# Altium PCB hut bui.PcbDoc
Units mil, origin at the board's own origin, x right, y up, seen from the top; angles counter-clockwise.
Board outline 6000 x 4000 mil, 2 copper layers (Top Layer, Bottom Layer); 10 components, 9 nets, 28 pads, 2 vias.
Unrouted connection lines stored in the file: 1.
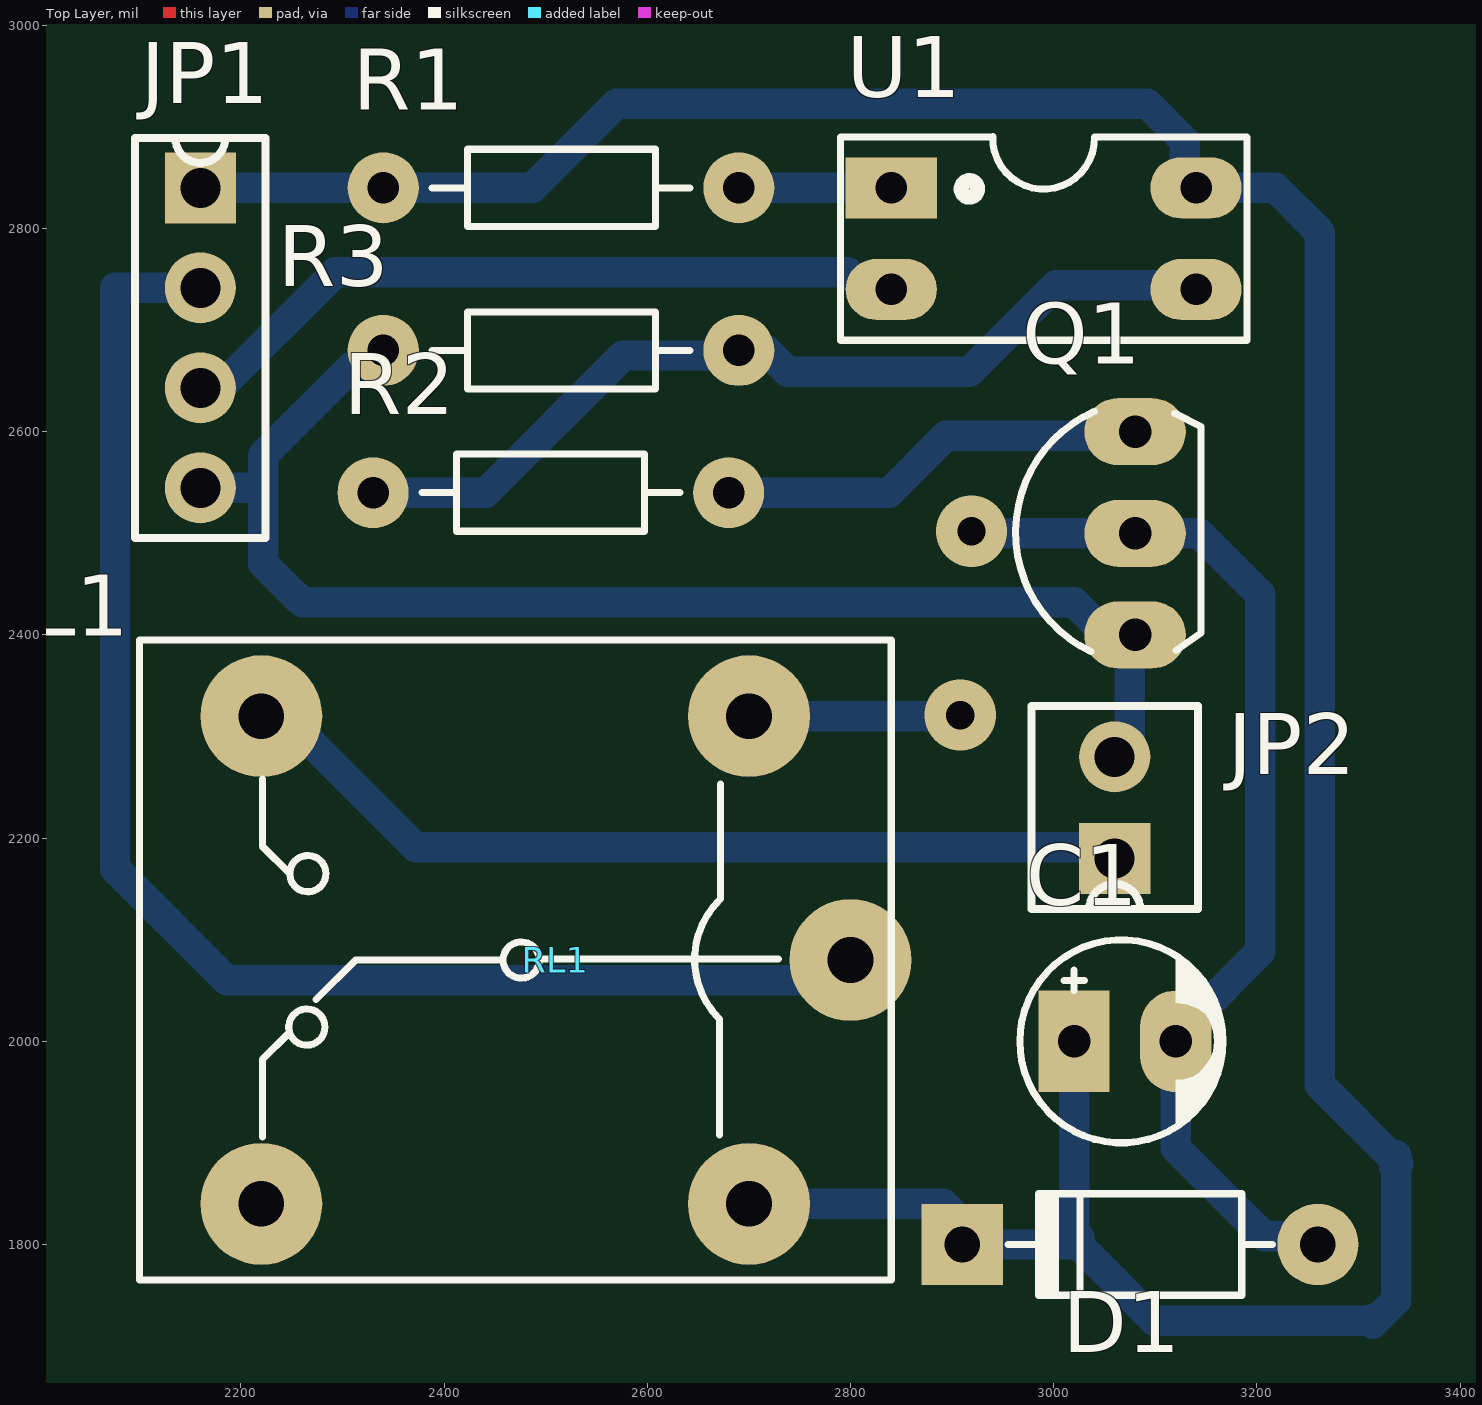
[diagram p0: Top Layer view]
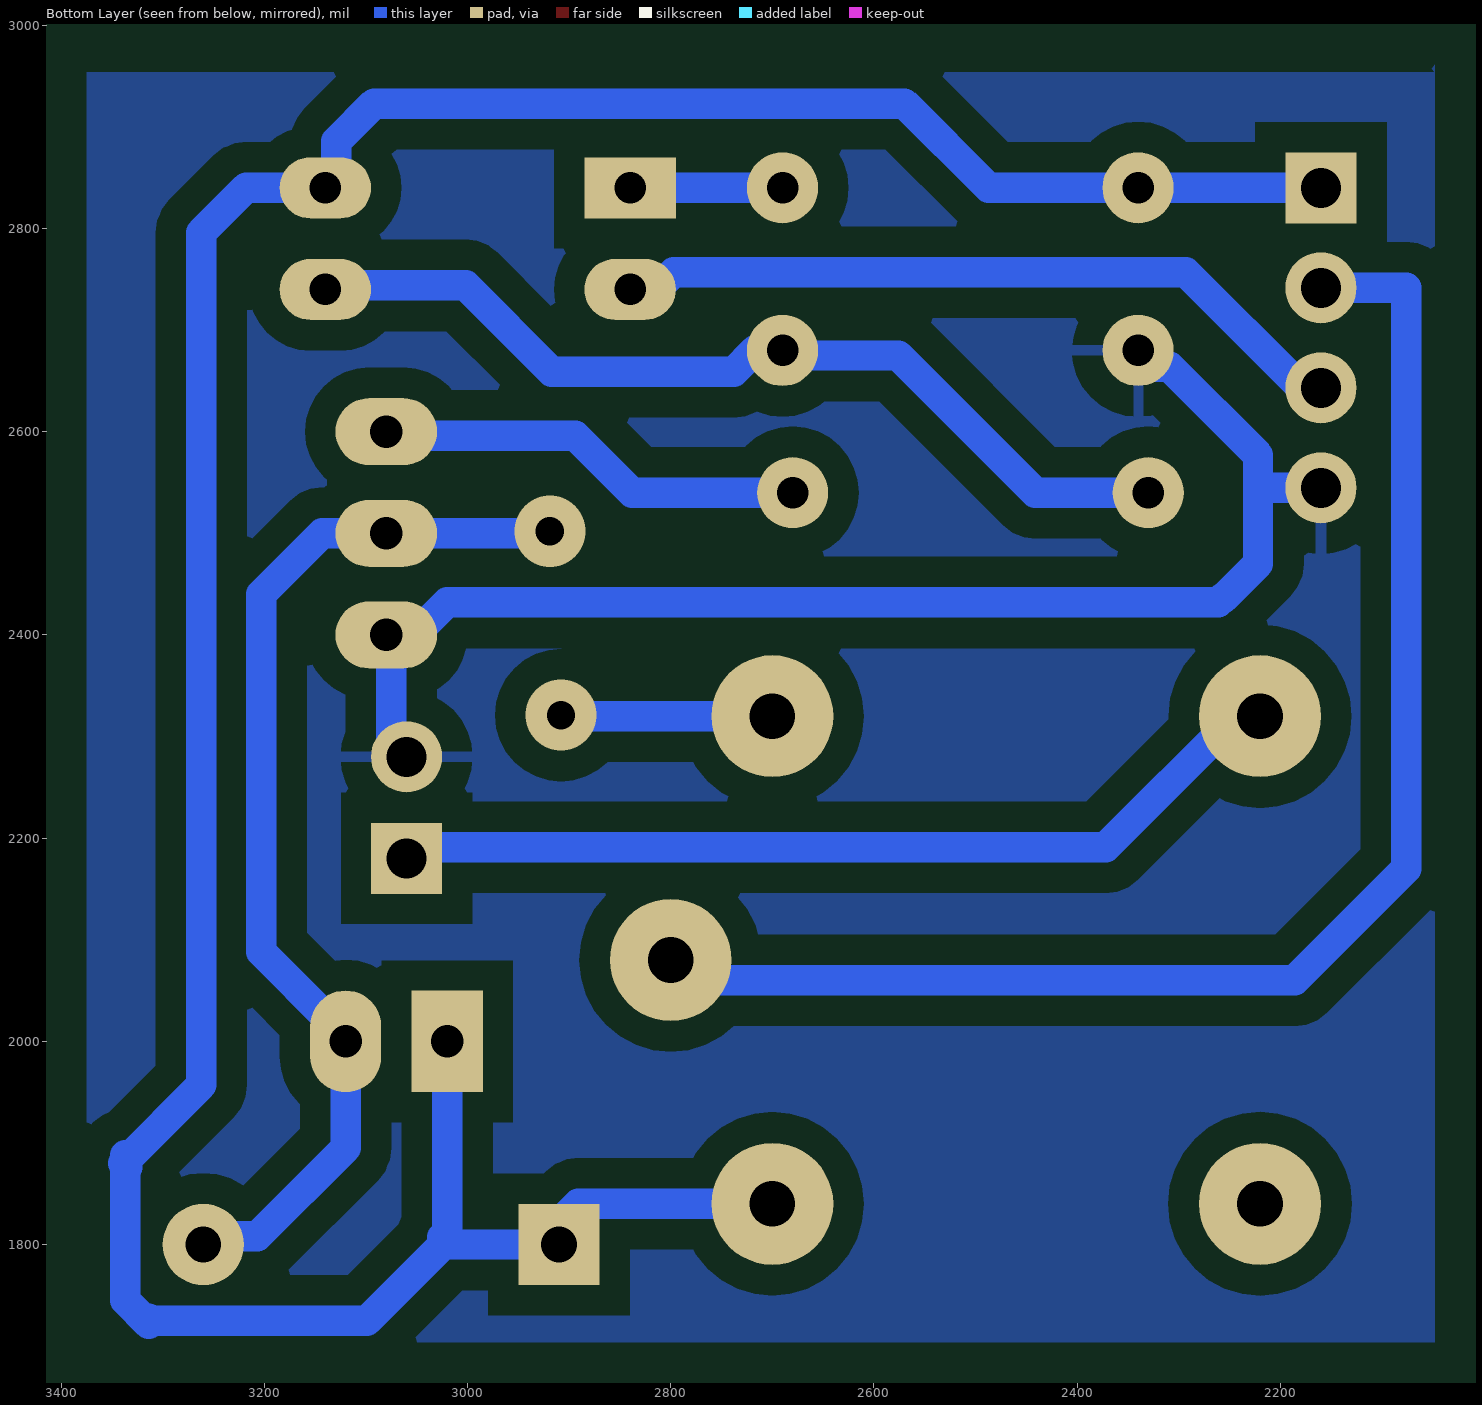
[diagram p1: Bottom Layer view, seen from below]
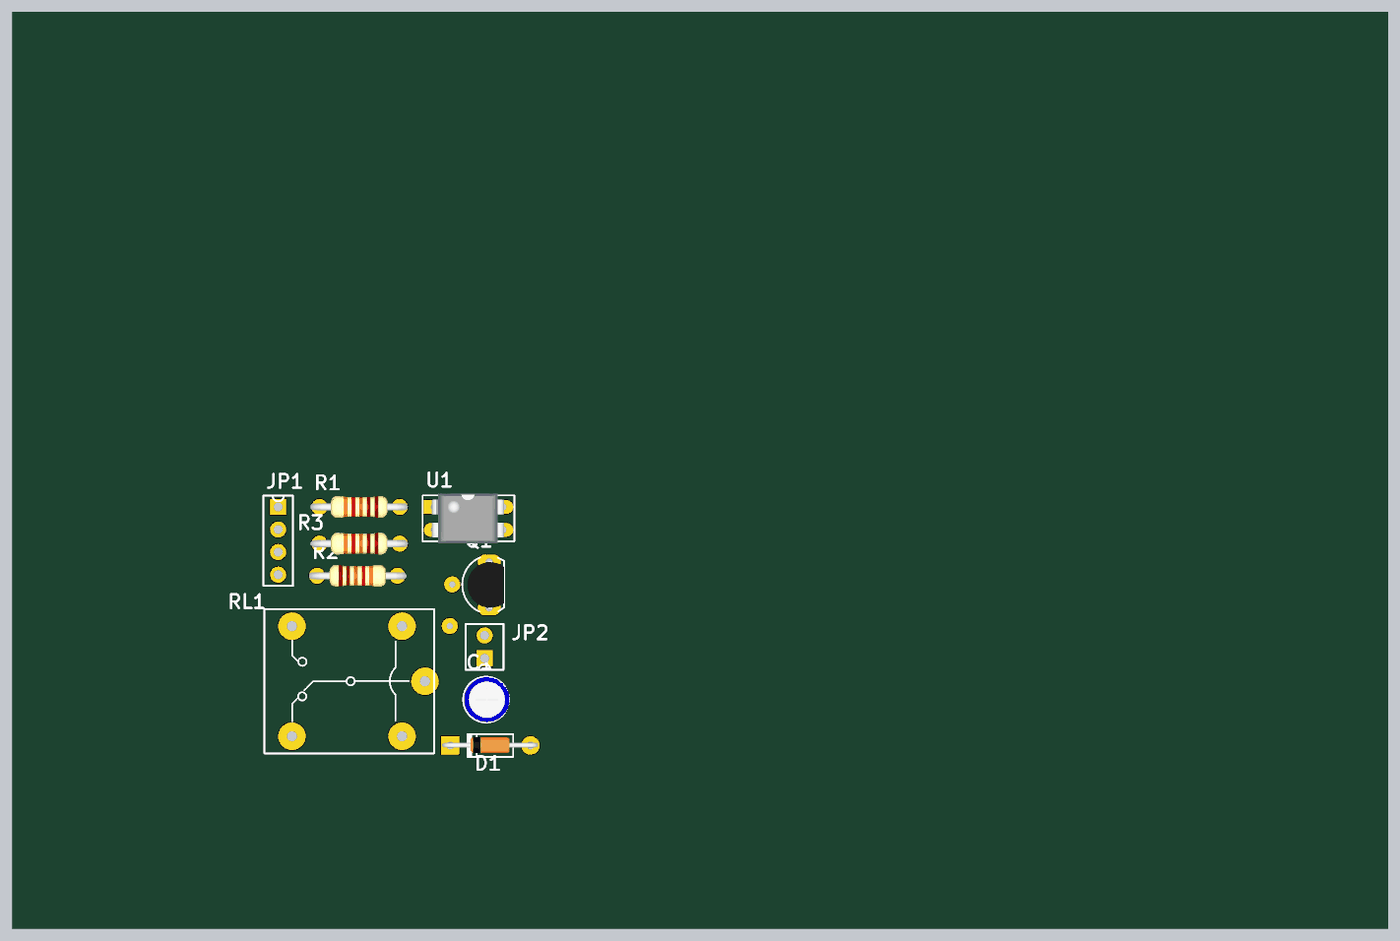
[diagram p2: 3D render of the assembled board from above, using the file's embedded part models]

## Layer stack, top to bottom
Top Layer: signal copper 1.4
Dielectric: dielectric 12.6, FR-4, Dk 4.8
Bottom Layer: signal copper 1.4

## Board outline
1000,1000 7000,1000 7000,5000 1000,5000

## Design rules (kind name [scope] priority, off if disabled: settings)
Clearance [All] p1: gap=30
PolygonConnect [All] p1: connectstyle=Relief reliefconductorwidth=10 reliefentries=4 polygonreliefangle="90 Angle"
RoomDefinition "HUT BUI" [InComponentClass('HUT BUI')] p1: confinementstyle=ConfineIn formatcopy=TRUE lockcomponents=FALSE outline 7045,1065 9820,1065 9820,1695 7045,1695
RoutingVias [All] p1: holewidth=28 width=50 viastyle="Through Hole" minholewidth=28 minwidth=50 maxholewidth=28 maxwidth=50
SilkscreenOverComponentPads [All] p1: minsilkscreentomaskgap=10
SolderMaskExpansion [All] p1: expansion=4
Width [All] p1: maxlimit=30 minlimit=30 preferedwidth=30
27 further rules are at their usual default settings.

## Components (designator, comment, footprint, x,y, rotation, side; value= is the part's Value field where it differs from the comment)
C1 "10uF" CP1/2 3020,2000 r0 top
D1 "1N4007" D1A 3260,1800 r0 top
JP1 "JP4" CON4 2160,2840 r0 top
JP2 "JP2" CON2 3060,2180 r180 top
Q1 "C1815" QTO-92 3080,2500 r90 top
R1 "220" R1/4W 2340,2840 r0 top
R2 "1K" R1/4W 2680,2540 r180 top
R3 "1K" R1/4W 2340,2680 r0 top
RL1 "Relay 10A/12V" RL_SPDT_10A 2800,2080 r180 top
U1 "PC817" DIP4/W0.3 2840,2840 r270 top

## Footprints (in the part's own frame and the unit in brackets; to place one, negate y for a bottom-side part, rotate by r counter-clockwise, add the part's x,y. Pads: shape width x height; smd on the part's side, far side on the other; paste and mask are expansions set on the pad)
CON2 [mil]
  rect 70x70 hole 39.37 unplated: 1(0,0)
  round 70 hole 39.37 unplated: 2(0,-100)
  silkscreen extent -82,-150 82,50
CON4 [mil]
  rect 70x70 hole 39.37 unplated: 1(0,0)
  round 70 hole 39.37 unplated: 2(0,-98.43) 3(0,-196.85) 4(0,-295.28)
  silkscreen extent -64,-344 64,49
CP1/2 [mil] "Tu hoa < 22uF/16>50V"
  rect 70x100 hole 32: 1(0,0)
  oval 70x100 hole 32: 2(100,0)
  silkscreen extent -53,-100 147,100, body extent -49,-99 149,99, height 287
D1A [mil] "Diode 1A, W 100mil, L 350mil"
  round 80 hole 35: 1(0,0)
  rect 80x80 hole 35: 2(-350,0)
  silkscreen extent -305,-50 -45,50, body extent -386,-33 34,36, height 84
DIP4/W0.3 [mil] "4 PIN, W 300mil, Pin to pin 100mil"
  rect 60x90 hole 31: 1(0,0)
  oval 60x90 hole 31: 2(100,0) 3(100,300) 4(0,300)
  silkscreen extent -50,-50 150,350, body extent -59,-10 159,305, height 170
QTO-92 [mil] "TO-92"
  oval 66x100 hole 32: 1(-100,0) 2(0,0) 3(100,0)
  silkscreen extent -117,-65 120,118, body extent -109,-66 109,95, height 245
R1/4W [mil] "R 1/4W, 2 Pin, 350mil"
  round 70 hole 31: 1(0,0) 2(350,0)
  silkscreen extent 48,-38 302,38, body extent -40,-47 386,47, height 111
RL_SPDT_10A [mil] "Relay SPDT, 5 pin, 10A,W 650mil, L 800mil, H 800mil"
  round 120 hole 45: 1(0,0) 2(580,240) 3(580,-240) 4(100,-240) 5(100,240)
  silkscreen extent -40,-315 700,315

## Part data
C1: library part CP1, "Cap P  0,1uF < 22uF , 16 - 50V"
D1: library part D1A, "Diode 1A"
JP1: library part Con4, "Connector 4"
JP2: library part Con2, "Connector 2"
Q1: "NPN 600mW, ECB"
R1 R2 R3: library part R1/4W, "Resistor 1/4W"
RL1: library part "Relay 1", "Relay SPDT,10A - 12VDC 5 Pin"
U1: "Single Opto"

## Via types
v1: diameter 70, hole 28, Top Layer to Bottom Layer, 2 vias

## Nets (pads, with @x,y where several pads share a name; then routed paths per layer and width w, separated by ;. In a path a pad name is that pad's centre, name@x,y a point inside that pad or via, vN(x,y) a via of type N, cw(c..) or ccw(c..) an arc to the next point about the centre after c; other vN are vias at no path point)
5V: JP1.2 RL1.1 | length 1414.5
  Bottom Layer w30: JP1.2 2076,2741.57 2076,2170 2186,2060 2771,2060 RL1.1@2784,2073
GND: JP1.4 JP2.2 Q1.1 R3.1 | length 1339.5
  Bottom Layer w30: JP1.4 2190.72,2544.72 2222,2544.72 ; R3.1@2336,2667 R3.1@2338,2669 ; R3.1@2343,2664 2309,2664 2222,2577 2222,2544.72 ; 2374,2432 2379,2432 ; Q1.1@3053,2399 Q1.1@3049,2403 ; Q1.1@3054,2403 Q1.1@3049,2403 ; JP2.2 3075,2295 Q1.1@3075,2414 ; 2222,2544.72 2222,2470 2256,2436 2257,2436 2261,2432 2379,2432 ; 2379,2432 2970,2432 2986,2432 3020,2432 Q1.1@3049,2403
"HUT BUI": JP1.3 U1.2 | length 699.7
  Bottom Layer w30: JP1.3 2179.15,2643.15 2293,2757 2797,2757 U1.2@2808,2746
NetC1_2: C1.2 D1.1 Q1.2 RL1.4 | length 1345
  Bottom Layer w30: 2780,2320 RL1.4 2903,2320 v1@2907,2324 ; v1(2919,2502) 2921,2500 Q1.2 3143,2500 3203,2440 3203,2088 C1.2@3134,2019 ; C1.2 3120,1895 3207,1808 D1.1@3276,1808
  other v1: 2908,2321
NetJP2_1: JP2.1 RL1.3 | length 871.7
  Bottom Layer w30: RL1.3 2243,2320 2372,2191 3034,2191 JP2.1@3037,2194
NetQ1_3: Q1.3 R2.1 | length 391.2
  Bottom Layer w30: R2.1 2838,2540 2894,2596 2958,2596 2980,2596 Q1.3@3048,2596
NetR1_2: R1.2 U1.1 | length 158.5
  Bottom Layer w30: R1.2 U1.1 U1.1@2846,2834
NetR2_2: R2.2 R3.2 U1.3 | length 879.5
  Bottom Layer w30: R2.2 2441,2540 2576,2675 R3.2@2682,2675 ; R3.2 2717,2680 2738,2659 2917,2659 3002,2744 U1.3@3110,2744 ; U1.3@3115.5,2738.5 3116,2739 U1.3@3123,2739
VCC: C1.1 D1.2 JP1.1 R1.1 RL1.5 U1.4 | length 3353.1
  Bottom Layer w30: JP1.1 R1.1 R1.1@2351,2840 ; R1.1@2350,2841 R1.1@2351,2840 ; RL1.5 2891,1840 2911,1820 D1.2@2911,1815 ; D1.2 3024,1800 ; 3020,1888 C1.1 3020,1812 3024,1808 ; 3025,1807 3024,1808 ; U1.4@3132,2852 3129,2855 3129,2886 3092,2923 2570,2923 2487,2840 R1.1@2351,2840 ; U1.4 3146.92,2840 3218,2840 3262,2796 3262,1957 3337,1882 ; 3183,1725 3235,1725 ; 3311.07,1725 3235,1725 ; 3314,1726.93 3314,1722 3337,1745 3337,1878 ; 3335,1876 3337,1878 ; 3337,1888 3337,1882 ; 3024,1800 3024,1808 ; 3024,1800 3099,1725 3235,1725 ; 3337,1878 3339,1880 3337,1882 ; 3337,1878 3337,1882
pads on no net: RL1.2

## Polygon pours and split planes (outlines as drawn)
GND on Bottom Layer "Bottom Layer-No Net" (solid): 2048,2954 3375,2954 3375,1697 3368,1704 2048,1704 2048,2962 2051,2965 2054,2962 2055,2962